# EAGLE board pixel (EAGLE 7.7.0)

No outline drawn. Coordinates in mm, seen from the top.
Copper layers (1*16): Top 0.035mm / dielectric 1.5mm / Bottom 0.035mm
Design rules "default": minimum track width 10mil, minimum drill 24mil, track to track 8mil, track to pad 8mil, pad to pad 8mil, via to via 8mil, smd to smd 8mil, copper to edge 40mil, drill to drill 8mil, minimum pad ring 10mil, minimum via ring 8mil, stop-mask expansion 4mil, vias tented up to drill 0mil, thermal gap 10mil

## Footprints (pad centres in the part's own frame; a part is rotated, then mirrored left to right if it is on the bottom)
C0603 = smd 0.6 x 0.9: 1 -0.725,0; 2 0.725,0
C1206 = smd 0.9 x 1.6: P$1 -1.55,0; P$2 1.55,0
DS1066-08M_SIDE = smd 1 x 3: 1 -6,-0.25; 2 -4,-0.25; 3 -2,-0.25; 4 0,-0.25; 5 2,-0.25; 6 4,-0.25; 7 6,-0.25
SC70_6L = smd 0.8 x 0.35: 1 -0.975,0.65; 2 -0.975,0; 3 -0.975,-0.65; 4 0.975,-0.65; 5 0.975,0; 6 0.975,0.65
SMA = smd 2.5 x 1.7: A -2,0; C 2,0
SOD123 = smd 1.6 x 0.8: A 1.7,0; C -1.7,0
LQFP32-7X7 = smd 1.2 x 0.5: 1 -4.25,2.8; 2 -4.25,2; 3 -4.25,1.2; 4 -4.25,0.4; 5 -4.25,-0.4; 6 -4.25,-1.2; 7 -4.25,-2; 8 -4.25,-2.8; 17 4.25,-2.8; 18 4.25,-2; 19 4.25,-1.2; 20 4.25,-0.4; 21 4.25,0.4; 22 4.25,1.2; 23 4.25,2; 24 4.25,2.8 | smd 0.5 x 1.2: 9 -2.8,-4.25; 10 -2,-4.25; 11 -1.2,-4.25; 12 -0.4,-4.25; 13 0.4,-4.25; 14 1.2,-4.25; 15 2,-4.25; 16 2.8,-4.25; 25 2.8,4.25; 26 2,4.25; 27 1.2,4.25; 28 0.4,4.25; 29 -0.4,4.25; 30 -1.2,4.25; 31 -2,4.25; 32 -2.8,4.25
SOT23 = smd 0.9 x 0.9: 1 -0.95,-1.1; 2 0.95,-1.1; 3 0,1.1
SOIC8 = smd 2.2 x 0.6: 1 -2.6,1.905; 2 -2.6,0.635; 3 -2.6,-0.635; 4 -2.6,-1.905; 5 2.6,-1.905; 6 2.6,-0.635; 7 2.6,0.635; 8 2.6,1.905
SOT23-5 = smd 0.55 x 1.2: 1 -0.95,-1.3; 2 0,-1.3; 3 0.95,-1.3; 4 0.95,1.3; 5 -0.95,1.3
SDR0604 = smd 2.1 x 5.8: 1 -1.95,0; 2 1.95,0
NRF24L01 = drill 1 pad 1.8 square: 1 -12.7,6.35 | drill 1 pad 1.8: 2 -10.16,6.35; 3 -12.7,3.81; 4 -10.16,3.81; 5 -12.7,1.27; 6 -10.16,1.27; 7 -12.7,-1.27; 8 -10.16,-1.27
SOT23-6 = smd 0.7 x 1: 1 -0.95,-1.3; 2 0,-1.3; 3 0.95,-1.3; 4 0.95,1.3; 5 0,1.3; 6 -0.95,1.3
R0603 = smd 0.6 x 0.9: 1 -0.725,0; 2 0.725,0
R0805 = smd 0.9 x 1.3: 1 -1,0; 2 1,0
R1206 = smd 0.9 x 1.6: P$1 -1.55,0; P$2 1.55,0
CAT16-J4 = smd 0.5 x 0.9: 1 -1.2,-0.8; 2 -0.4,-0.8; 3 0.4,-0.8; 4 1.2,-0.8; 5 1.2,0.8; 6 0.4,0.8; 7 -0.4,0.8; 8 -1.2,0.8
RES_0 = smd 1.5 x 1.5: 1 -0.85,0; 2 0.85,0
OSCILLATOR-3.2X2.5 = smd 1.3 x 1.1: 1 -1.15,-0.9; 2 1.15,-0.9; 3 1.15,0.9; 4 -1.15,0.9

## Placement (x,y rotation side)
C1  100 nF  [C0603]  -18,-62 0 top
C2  100 nF  [C0603]  -6,-46 0 top
C3  100 nF  [C0603]  -2,-46 0 top
C4  1 uF  [C0603]  18,-46 0 top
C5  10 nF  [C0603]  12,-46 0 top
C6  4.7 uF  [C0603]  9,-46 0 top
C7  100 nF  [C0603]  2,-46 0 top
C8  100 nF  [C0603]  6,-46 0 top
C9  [C0603]  1,-50 0 top
C10  [C0603]  4,-50 0 top
C11  0.1uF  [C0603]  15,-46 0 top
C12  100 nF  [C0603]  -18,-66 0 top
C13  1nF  [C1206]  3,-29 0 top
C14  10uF 6.3V  [C1206]  -50,-108 0 top
CON1  DS1066-07M-SIDE  [DS1066-08M_SIDE]  -4,-21 0 top
CON2  DS1066-07M-SIDE  [DS1066-08M_SIDE]  12,-21 0 top
D1  SMF05C  [SC70_6L]  -10,-53 0 top
D2  SMAJ12A  [SMA]  12,-50 0 top
D4  CRS08-SOD123  [SOD123]  -47,-78 0 top
IC1  STM32F030K6TX-LQFP32(7X7)  [LQFP32-7X7]  -6,-33 0 top
IC2  ESDA6V1L  [SOT23]  -10,-46 0 top
IC3  ST3485SOIC8  [SOIC8]  8,-34 0 top
IC4  MC74VHC1GT125  [SOT23-5]  -15,-56 0 top
IC5  MC74VHC1GT125  [SOT23-5]  -19,-56 0 top
L1  47UH  [SDR0604]  -28,-57 0 top
NRF24L01  NRF24L01  [NRF24L01]  -30,-95 0 top
Q1  FDC6420C  [SOT23-6]  -34,-64 0 top
R1  60R  [R0603]  -11,-50 0 top
R2  560R  [R0603]  -8,-50 0 top
R3  560R  [R0603]  -5,-50 0 top
R4  22R  [R0805]  -38,-65 0 top
R5  22R  [R0805]  -42,-65 0 top
R6  10K  [R0805]  -46,-65 0 top
R7  2R  [R1206]  -50,-74 0 top
R9  60R  [R0603]  -2,-50 0 top
R11  22R  [R0805]  -3,-42 0 top
R12  22R  [R0805]  1,-42 0 top
RN1  510R  [CAT16-J4]  -2,-25 0 top
RN2  510R  [CAT16-J4]  -9,-57 0 top
SJ1  [RES_0]  7,-42 0 top
SJ2  [RES_0]  14,-42 0 top
Z1  16MHz  [OSCILLATOR-3.2X2.5]  -9,-42 0 top

## Library data of the parts
C1-C12 R1-R3 R9 = rc; PACKAGE: 0603
C13 = rc; ASSEMBLY: SPECIAL; PACKAGE: 1206
C14 R7 = rc; PACKAGE: 1206
CON1 CON2 = pixel_masterlib
D1 = pixel_masterlib; DIGIKEY#: SMF05CCT-ND; MANF: Semtech Corporation; MANF#: SMF05C.TCT
D2 = masterlib; DIGIKEY#: SMAJ12CABTR-ND; MANF: Bourns Inc; MANF#: SMAJ12CA
D4 = eth_conv_master_lib; DIGIKEY#: CRS08QMCT-ND; MANF: Toshiba Semiconductor and Storage; MANF#: CRS08(TE85L,Q,M)
IC1 = pixel_masterlib; DIGIKEY#: 497-14046-ND; MANF: STMicroelectronics; MANF#: STM32F030K6T6
IC2 = pixel_masterlib; DIGIKEY#: 497-2930-2-ND; MANF: STMicroelectronics; MANF#: ESDA6V1L
IC3 = pixel_masterlib; DIGIKEY#: 497-2080-1-ND; MANF: STMicroelectronics; MANF#: ST3485EBDR
IC4 IC5 = pixel_masterlib; DIGIKEY#: MC74VHC1GT125DT1GOSDKR-ND; MANF: ON Semiconductor; MANF#: MC74VHC1GT125
L1 = power_inductors; DIGIKEY#: SDR0604-470KLCT-ND; MANF: Bourns Inc; MANF#: SDR0604-470KL
NRF24L01 = ali_modules
Q1 = pixel_masterlib; DIGIKEY#: FDC6420CTR-ND; MANF: Fairchild; MANF#: FDC6420C
R4-R6 R11 R12 = rc; PACKAGE: 0805
RN1 RN2 = pixel_masterlib; DIGIKEY#: CAT16-511J4LF-ND; MANF: Bourns Inc; MANF#: CAT16-511J4LF
SJ1 SJ2 = eth_conv_master_lib
Z1 = watchdog_master_library; DIGIKEY#: 1253-1182-1-ND; MANF: AVX Corp/Kyocera Corp; MANF#: CX3225GB16000P0HPQCC

## Nets
A: D2.A IC2.2 IC3.6 R1.2 R3.2 R11.1 R11.2
B: D2.C IC2.3 IC3.7 R2.1 R12.1 R12.2 SJ2.1
CK: IC1.10
CLOCK: D1.5 IC1.22 IC4.2 RN1.2
CLOCK_BUFFERED: IC4.4 RN2.2
DATA_IN: D1.4 RN1.1
DATA_OUT: RN2.1
DC-DC_FB: IC1.6
DC-DC_PWM: IC1.13
DE: IC3.2 IC3.3
GND: C1.1 C2.1 C3.1 C4.1 C5.1 C6.1 C7.1 C8.1 C9.1 C10.2 C11.1 C12.1 C13.P$2 C14.P$2 CON1.7 CON2.7 D1.2 D4.A IC1.16 IC1.32 IC2.1 IC3.5 IC4.3 IC5.3 NRF24L01.1 Q1.5 R3.1 R7.P$1 Z1.2 Z1.4
LATCH: D1.6 IC1.21 IC5.2 RN1.3
LATCH_BUFFERED: IC5.4 RN2.3
LED1_PWM: IC1.18 R4.1
LED2_FB: IC1.11
LED2_PWM: IC1.19
LED3_FB: IC1.12
LED3_PWM: IC1.20
MISO: IC1.27 NRF24L01.7
MOSI: IC1.28 NRF24L01.6
N$1: C9.2 IC1.2 Z1.1
N$2: CON1.4 RN1.8
N$3: C10.1 IC1.3 Z1.3
N$4: CON1.5 RN1.7
N$5: CON1.6 RN1.6
N$6: CON2.4 RN2.8
N$7: Q1.3 R5.2 R6.2
N$8: R1.1 R9.2 SJ1.1
N$9: CON2.5 RN2.7
N$10: R9.1 SJ2.2
N$11: C13.P$1 SJ1.2
N$12: CON2.6 RN2.6
N$13: Q1.1 R4.2
N$15: Q1.6 R5.1
N$17: D4.C L1.1 Q1.2
NRF_CE: NRF24L01.3
NRF_CSN: NRF24L01.4
NRF_IRQ: NRF24L01.8
RE/DE: IC1.7
RS485_A: CON1.2 CON2.2
RS485_B: CON1.3 CON2.3
RX: IC1.9 IC3.1
SCK: IC1.26 NRF24L01.5
SYS_SWCLK: IC1.24
SYS_SWDIO: IC1.23
TEMP: IC1.14
TX: IC1.8 IC3.4
VDD_3V3: C1.2 C2.2 C3.2 C4.2 C5.2 C6.2 C7.2 C8.2 C11.2 C12.2 C14.P$1 IC1.1 IC1.5 IC1.17 IC3.8 IC4.5 IC5.5 NRF24L01.2 R2.2
VDD_12V: Q1.4 R6.1
VDD_24V: CON1.1 CON2.1

## Tracks (layer width: path | path; a pad name or v marks a point on that pad's centre or on a via)
A  (6 unrouted)
B  (6 unrouted)
CLOCK  (3 unrouted)
CLOCK_BUFFERED  (1 unrouted)
DATA_IN  (1 unrouted)
DE  (1 unrouted)
GND  (29 unrouted)
LATCH  (3 unrouted)
LATCH_BUFFERED  (1 unrouted)
LED1_PWM  (1 unrouted)
MISO  (1 unrouted)
MOSI  (1 unrouted)
N$1  (2 unrouted)
N$2  (1 unrouted)
N$3  (2 unrouted)
N$4  (1 unrouted)
N$5  (1 unrouted)
N$6  (1 unrouted)
N$7  (2 unrouted)
N$8  (2 unrouted)
N$9  (1 unrouted)
N$10  (1 unrouted)
N$11  (1 unrouted)
N$12  (1 unrouted)
N$13  (1 unrouted)
N$15  (1 unrouted)
N$17  (2 unrouted)
RS485_A  (1 unrouted)
RS485_B  (1 unrouted)
RX  (1 unrouted)
SCK  (1 unrouted)
TX  (1 unrouted)
VDD_3V3  (18 unrouted)
VDD_12V  (1 unrouted)
VDD_24V  (1 unrouted)